# EAGLE board Charging a capacitor PCB (EAGLE 9.7.0)
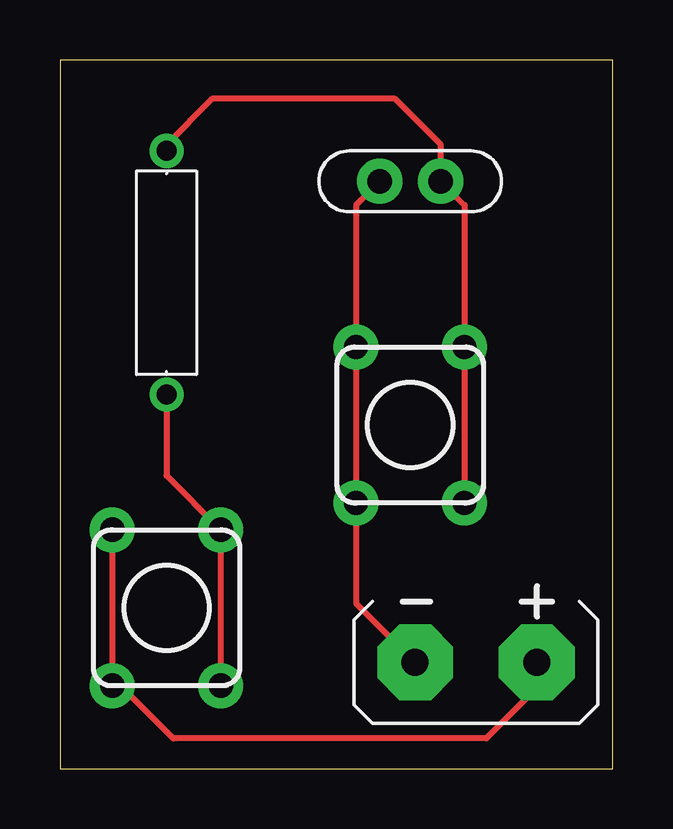
[diagram p0: board, top side]

Size 23.06 x 29.56 mm. Coordinates in mm from the lower left corner, seen from the top.
Outline: 0,0 23.06,0 23.06,29.56 0,29.56 0,0
Copper layers (1*16): Top 0.035mm / dielectric 1.5mm / Bottom 0.035mm
Design rules "default": minimum track width 6mil, minimum drill 0.35mm, track to track 6mil, track to pad 6mil, pad to pad 6mil, via to via 6mil, smd to smd 6mil, copper to edge 40mil, drill to drill 6mil, minimum pad ring 10mil, minimum via ring 8mil, stop-mask expansion 4mil, vias tented up to drill 0mil, thermal gap 10mil

## Footprints (pad centres in the part's own frame; a part is rotated, then mirrored left to right if it is on the bottom)
BATTERY-GENERIC = drill 1.118 pad 3.15 octagon: + 2.54,0; - -2.54,0
CAP-THRU-2.54MM = drill 1.016 pad 1.88: 1 -1.27,0; 2 1.27,0
RESAD1016W63L850D250B = drill 0.83 pad 1.43: 1 -5.08,0; 2 5.08,0
SWITCH-MOMENTARY-PTH-6.5MM = drill 1.016 pad 1.88: 1 -3.251,2.261; 2 3.251,2.261; 3 -3.251,-2.261; 4 3.251,-2.261

## Placement (x,y rotation side)
BAT1  9V  [BATTERY-GENERIC]  17.35,4.45 0 top
C1  100n  [CAP-THRU-2.54MM]  14.6,24.5 180 top
R1  1k  [RESAD1016W63L850D250B]  4.45,20.69 90 top
S1  SWITCH_MOMENTARY  [SWITCH-MOMENTARY-PTH-6.5MM]  4.45,6.72 90 top
S2  SWITCH_MOMENTARY  [SWITCH-MOMENTARY-PTH-6.5MM]  14.6,14.34 90 top

## Library data of the parts
BAT1 C1 R1 S1 S2 = Tinkercad

## Nets
BAT1+: BAT1.+ S1.1 S1.2
BAT1-: BAT1.- C1.2 S2.1 S2.2
S1_3: R1.1 S1.3 S1.4
S2_3: C1.1 R1.2 S2.3 S2.4

## Tracks (layer width: path | path; a pad name or v marks a point on that pad's centre or on a via)
BAT1+
  Top 0.254: S1.2 2.18,3.81 | 2.18,3.81 S1.1 | BAT1.+ 19.89,3.38 17.78,1.27 4.72,1.27 2.18,3.81
BAT1-
  Top 0.254: BAT1.- 12.34,6.91 S2.1 S2.2 12.34,23.51 C1.2
S1_3
  Top 0.254: R1.1 4.45,12.23 S1.4 S1.3
S2_3
  Top 0.254: S2.3 S2.4 16.87,23.51 C1.1 15.87,26.04 13.97,27.94 6.35,27.94 4.45,26.04 R1.2